# EAGLE board finger_r1.2 (EAGLE 9.4.2)
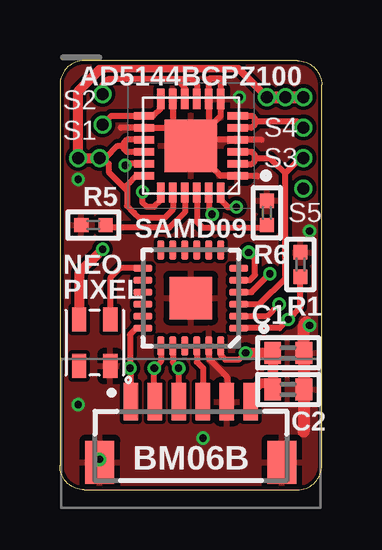
[diagram p0: board, top side]
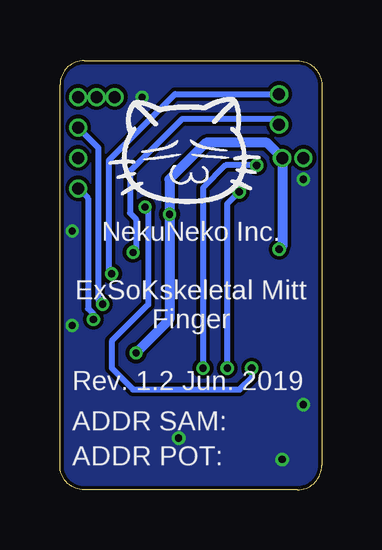
[diagram p1: board, bottom side, seen from below]

Size 10.92 x 17.91 mm. Coordinates in mm from the lower left corner, seen from the top.
Outline: 1.02,0 9.91,0 arc90 10.92,1.02 10.92,16.89 arc90 9.91,17.91 1.02,17.91 arc90 0,16.89 0,1.02 arc90 1.02,0
Copper layers (1*16): Top 0.035559375mm / dielectric 1.6mm / Bottom 0.035559375mm
Design rules "nekuneko *": minimum track width 6mil, minimum drill 0.3mm, track to track 6mil, track to pad 6mil, pad to pad 6mil, via to via 6mil, smd to smd 6mil, copper to edge 6mil, drill to drill 6mil, minimum pad ring 5mil, minimum via ring 5mil, stop-mask expansion 2.5mil, vias tented up to drill 15mil, thermal gap 10mil

## Footprints (pad centres in the part's own frame; a part is rotated, then mirrored left to right if it is on the bottom)
QFN50P400X400X80-25N = smd 0.85 x 0.3: 1 -1.95,1.25; 2 -1.95,0.75; 3 -1.95,0.25; 4 -1.95,-0.25; 5 -1.95,-0.75; 6 -1.95,-1.25; 13 1.95,-1.25; 14 1.95,-0.75; 15 1.95,-0.25; 16 1.95,0.25; 17 1.95,0.75; 18 1.95,1.25 | smd 0.3 x 0.85: 7 -1.25,-1.95; 8 -0.75,-1.95; 9 -0.25,-1.95; 10 0.25,-1.95; 11 0.75,-1.95; 12 1.25,-1.95; 19 1.25,1.95; 20 0.75,1.95; 21 0.25,1.95; 22 -0.25,1.95; 23 -0.75,1.95; 24 -1.25,1.95 | smd 2.2 x 2.2: 25 0,0
BM06BSRSSTBLFSN = smd 0.6 x 1.55: 1 -2.5,-1.65; 2 -1.5,-1.65; 3 -0.5,-1.65; 4 0.5,-1.65; 5 1.5,-1.65; 6 2.5,-1.65 | smd 1.2 x 1.8: MP1 -3.8,0.875; MP2 3.8,0.875
0402 = smd 0.7 x 0.9: 1 -0.65,0; 2 0.65,0
SK6805-2427 = smd 1 x 0.6: DIN 0.375,1.85; DOUT 2.325,0.55; GND 2.325,1.85; VCC 0.375,0.55
_0402 = smd 0.6 x 0.6: 1 -0.508,0; 2 0.508,0
QFN24_4MM = smd 0.8 x 0.28: 1 -2,1.25; 2 -2,0.75; 3 -2,0.25; 4 -2,-0.25; 5 -2,-0.75; 6 -2,-1.25; 13 2,-1.25; 14 2,-0.75; 15 2,-0.25; 16 2,0.25; 17 2,0.75; 18 2,1.25 | smd 0.28 x 0.8: 7 -1.25,-2; 8 -0.75,-2; 9 -0.25,-2; 10 0.25,-2; 11 0.75,-2; 12 1.25,-2; 19 1.25,2; 20 0.75,2; 21 0.25,2; 22 -0.25,2; 23 -0.75,2; 24 -1.25,2 | smd 1.778 x 1.778: THERM 0,0

## Placement (x,y rotation side)
AD5144BCPZ100  AD5144BCPZ100-RL7  [QFN50P400X400X80-25N]  5.46,14.35 180 top
BM06B  BM06B-SRSS-TB(LF)(SN)  [BM06BSRSSTBLFSN]  5.46,2.03 180 top
C1  0.1uF  [0402]  9.53,5.71 0 top
C2  10uF  [0402]  9.53,4.19 0 top
FRAME1  FRAME-LETTER  [CREATIVE_COMMONS]  9.91,-63.5 0 top  (outside the outline)
FRAME2  FRAME-LETTER  [CREATIVE_COMMONS]  12.95,-43.94 0 top  (outside the outline)
NEO  NEOPIXEL_NANO_2427  [SK6805-2427]  0.25,7.49 270 top
R1  10k~Conf  [_0402]  10.03,9.4 90 top
R5  0  [_0402]  1.4,11.05 0 top
R6  0  [_0402]  8.64,11.56 270 top
SAMD09  ATSAMD09D14A-MU  [QFN24_4MM]  5.46,8 180 top
U$1  [NEKO_DRAWN]  8.89,11.94 0 bottom

## Library data of the parts
AD5144BCPZ100 = SamacSys_Parts; DESCRIPTION: ANALOG DEVICES - AD5144BCPZ100-RL7 - DIGITAL POT, 100KOHM, QUAD, LFCSP-24; HEIGHT: 0.8mm; MANUFACTURER_NAME: Analog Devices; MANUFACTURER_PART_NUMBER: AD5144BCPZ100-RL7; MOUSER_PART_NUMBER: 584-AD5144BCPZ100-R7; MOUSER_PRICE-STOCK: https://www.mouser.com/Search/Refine.aspx?Keyword=584-AD5144BCPZ100-R7
BM06B = 0SoK; DESCRIPTION: connector,multipole PCB use,BM06B-SRSS-T JST SH Series, 1mm Pitch 6 Way 1 Row Straight PCB Header, Solder Termination, 1A; HEIGHT: 4.25mm; MANUFACTURER_NAME: JST (JAPAN SOLDERLESS TERMINALS); MANUFACTURER_PART_NUMBER: BM06B-SRSS-TB(LF)(SN); RS_PART_NUMBER: 5468782; RS_PRICE-STOCK: https://uk.rs-online.com/web/p/products/5468782
C1 C2 R1 R5 R6 SAMD09 = microbuilder
FRAME1 FRAME2 = SparkFun-Aesthetics
NEO = NeoPixel Nano 2427
U$1 = 0Logos

## Nets
3.3V: AD5144BCPZ100.15 AD5144BCPZ100.16 AD5144BCPZ100.18 AD5144BCPZ100.20 AD5144BCPZ100.23 BM06B.1 C1.1 C2.1 NEO.VCC SAMD09.24
!RESET: AD5144BCPZ100.24 BM06B.6 SAMD09.18
ADDR0: AD5144BCPZ100.22 R6.2
ADDR1: AD5144BCPZ100.21 R5.2
FLEX_SENSOR: AD5144BCPZ100.12 AD5144BCPZ100.13 SAMD09.5
GND: AD5144BCPZ100.1 AD5144BCPZ100.4 AD5144BCPZ100.7 AD5144BCPZ100.8 AD5144BCPZ100.11 AD5144BCPZ100.14 AD5144BCPZ100.25 BM06B.2 BM06B.MP1 BM06B.MP2 C1.2 C2.2 NEO.GND R1.2 R5.1 R6.1 SAMD09.23 SAMD09.THERM
IRQ: BM06B.3 SAMD09.22
NEOPIXEL: NEO.DIN SAMD09.13
PA07: SAMD09.6
PA17: SAMD09.14
PA22: SAMD09.15
PA23: SAMD09.16
PA27: SAMD09.17
PRESSURE_SENSOR1: AD5144BCPZ100.2 AD5144BCPZ100.3 SAMD09.3
PRESSURE_SENSOR2: AD5144BCPZ100.5 AD5144BCPZ100.6 SAMD09.2
PRESSURE_SENSOR3: AD5144BCPZ100.9 AD5144BCPZ100.10 SAMD09.4
PRESSURE_SENSOR4: R1.1 SAMD09.1
SWCLK_SDA: AD5144BCPZ100.19 BM06B.5 SAMD09.19
SWDIO_SCL: AD5144BCPZ100.17 BM06B.4 SAMD09.20

## Tracks (layer width: path | path; a pad name or v marks a point on that pad's centre or on a via)
3.3V  (via drill 0.3, 0.5)
  Top 0.254: v7.75,5.71 7.46,5.43 6.9,5.43 6.71,5.62 SAMD09.24 | AD5144BCPZ100.20 4.71,11.7 4.36,11.34 3.31,11.34 3.1,11.56 2.79,11.86 2.79,12.49 | AD5144BCPZ100.18 3.19,13.1 2.79,12.7 2.79,12.62 2.79,12.49 | AD5144BCPZ100.15 2.79,14.6 2.67,14.48 2.67,14.35 | 2.67,14.35 2.67,14.22 2.79,14.1 2.8,14.1 AD5144BCPZ100.16 | 2.67,14.35 2.41,14.35 1.91,13.84 v1.65,13.84 1.78,13.84 2.03,13.59 2.03,13.26 2.79,12.49 | AD5144BCPZ100.23 6.21,11.57 6.32,11.46 v6.35,11.49
  Top 0.305: 1.65,17.53 1.7,17.58 7.44,17.58 v8.64,16.38
  Top 0.406: v7.75,5.71 C1.1 8.88,4.95 C2.1 8.62,4.45 8.34,4.45 7.96,4.06 BM06B.1 | v1.78,10.03 0.8,9.06 NEO.VCC | 1.65,17.53 0.76,16.64 v0.76,13.84 v1.65,13.84
  Top 0.508: v8.64,16.38 v9.4,16.38 v10.16,16.38
  Bottom 0.406: v7.75,5.71 6.35,7.11 v6.35,11.49 6.35,12.95 4.83,14.48 2.29,14.48 v1.65,13.84 1.65,10.16 v1.78,10.03
!RESET  (via drill 0.3)
  Top 0.254: v7.37,11.79 7,11.79 6.71,12.09 AD5144BCPZ100.24 | SAMD09.18 3.19,6.75 2.92,6.48 v2.92,5.08 | v2.92,5.08 2.96,5.04 | BM06B.6 2.96,5.04 | 2.96,5.04 v2.92,5.08
  Bottom 0.254: v7.37,11.79 7.24,11.67 7.24,7.73 8.76,6.21 8.76,5.08 7.87,4.19 3.43,4.19 2.92,4.7 v2.92,5.08
ADDR0
  Top 0.254: R6.2 8.75,10.93 5.96,10.93 5.71,11.18 AD5144BCPZ100.22
ADDR1
  Top 0.254: AD5144BCPZ100.21 5.21,11.57 4.57,10.93 2.02,10.93 R5.2
FLEX_SENSOR  (via drill 0.3, 0.5)
  Top 0.254: v1.78,15.24 2.14,15.6 AD5144BCPZ100.13 3.89,15.6 4.21,15.92 AD5144BCPZ100.12 | v7.87,9.91 8.14,9.64 8.14,8.97 7.92,8.75 SAMD09.5
  Bottom 0.254: v7.87,9.91 7.75,10.03 7.75,11.3 8,11.55 8,13.29 5.82,15.47 2.01,15.47 v1.78,15.24
GND  (via drill 0.3)
  Top 0.254: AD5144BCPZ100.25 5.91,14.52 5.99,14.6 8.43,14.6 | 5.52,14.29 6.71,13.11 6.98,13.11 6.98,13.1 AD5144BCPZ100.1 8.23,13.1 8.26,13.08 | 5.52,14.29 AD5144BCPZ100.25 | AD5144BCPZ100.25 6.71,15.6 6.71,15.87 AD5144BCPZ100.7 6.71,17.12 6.73,17.14 6.22,17.14 6.21,17.13 AD5144BCPZ100.8 6.21,14.97 5.52,14.29 | AD5144BCPZ100.11 4.71,15.1 | 4.71,15.1 AD5144BCPZ100.25 | 4.71,15.1 AD5144BCPZ100.14 2.55,15.1 2.54,15.11 | 4.71,15.1 5.52,14.29 | SAMD09.23 6.21,5.47 6.99,4.7 6.99,3.71 BM06B.2
  Top 0.508: 10.18,2.43 C2.2 C1.2 10.18,6.8 10.21,6.83 10.21,6.91 10.29,6.99
  other vias: 10.41,10.79 0.76,12.95 7.49,16.38 1.65,1.27 5.97,2.16 0.76,3.56 10.41,6.86
  pour Top (isolate 0.012): 10.92,0 10.92,17.91 0,17.91 0,0
  pour Bottom (isolate 0.012): 0,0 10.92,0 10.92,17.91 0,17.91
IRQ
  Top 0.254: SAMD09.22 5.71,5.34 5.97,5.08 BM06B.3
NEOPIXEL
  Top 0.254: SAMD09.13 2.52,9.25 2.1,8.84 NEO.DIN
PRESSURE_SENSOR1  (via drill 0.5)
  Top 0.254: 7.42,13.59 AD5144BCPZ100.2 7.42,13.59 | 7.42,13.59 8,13.59 8.13,13.72 8.13,13.84 | 8.13,13.84 8.13,13.97 8,14.1 AD5144BCPZ100.3 | SAMD09.3 8.33,7.75 9.4,8.82 9.4,13.21 | 9.4,13.21 8.91,13.69 8.76,13.84 8.13,13.84 | 9.4,13.21 10.03,13.84 v10.16,13.84
PRESSURE_SENSOR2  (via drill 0.3, 0.5)
  Top 0.254: 7.43,15.62 AD5144BCPZ100.6 8.02,15.6 8.13,15.49 8.13,15.37 | AD5144BCPZ100.5 7.99,15.1 8.13,15.24 8.13,15.37 | SAMD09.2 8.65,7.25 v9.14,7.75 | v10.16,15.11 9.91,15.37 8.13,15.37
  Bottom 0.254: v9.14,7.75 9.32,7.92 9.32,14.27 v10.16,15.11
PRESSURE_SENSOR3  (via drill 0.3, 0.5)
  Top 0.254: SAMD09.4 8,8.25 v8.76,9.02 | v1.78,16.51 1.78,16.89 2.03,17.14 4.84,17.14 | 4.84,17.14 5.21,16.77 AD5144BCPZ100.10 | 4.84,17.14 5.46,17.14 5.71,16.89 AD5144BCPZ100.9
  Bottom 0.254: v8.76,9.02 8.89,9.14 8.89,13.74 6.12,16.51 v1.78,16.51
PRESSURE_SENSOR4  (via drill 0.3 pad 0.3, 0.5)
  Top 0.254: SAMD09.1 9.16,6.75 v9.53,7.11 10.03,7.62 R1.1
  Bottom 0.254: v9.53,7.11 9.53,7.34 9.75,7.57 9.75,12.16 v10.16,12.57
SWCLK_SDA  (via drill 0.3)
  Top 0.254: SAMD09.19 4.21,5.35 v3.94,5.08 3.94,3.71 BM06B.5 | v3.45,12.43 3.45,11.99 3.63,11.81 3.94,11.81 4.21,12.09 AD5144BCPZ100.19
  Bottom 0.254: v3.45,12.43 3.94,11.94 v3.94,5.08
SWDIO_SCL  (via drill 0.3)
  Top 0.254: SAMD09.20 4.71,5.32 v4.95,5.08 | 4.96,5.07 v4.95,5.08 | BM06B.4 4.96,5.07 | 4.96,5.07 v4.95,5.08 | AD5144BCPZ100.17 2.78,13.6 v2.71,13.54
  Bottom 0.254: v4.95,5.08 4.95,12.6 4.01,13.54 v2.71,13.54

## Text on the board
tPlace: S2 | S1 | S4 | S3 | S5
bPlace: NekuNeko Inc. | ExSoKskeletal Mitt / Finger | Rev. 1.2 Jun. 2019 | ADDR SAM: / ADDR POT:
tNames: NEO / PIXEL